# Altium PCB real_watch_1v1_displayboard.PcbDoc
Units mil, origin at the board's own origin, x right, y up, seen from the top; angles counter-clockwise.
Board outline 1574.8 x 1574.8 mil, 2 copper layers (Top Layer, Bottom Layer), stack 22.8 mil thick; 43 components, 48 nets, 177 pads, 53 vias.
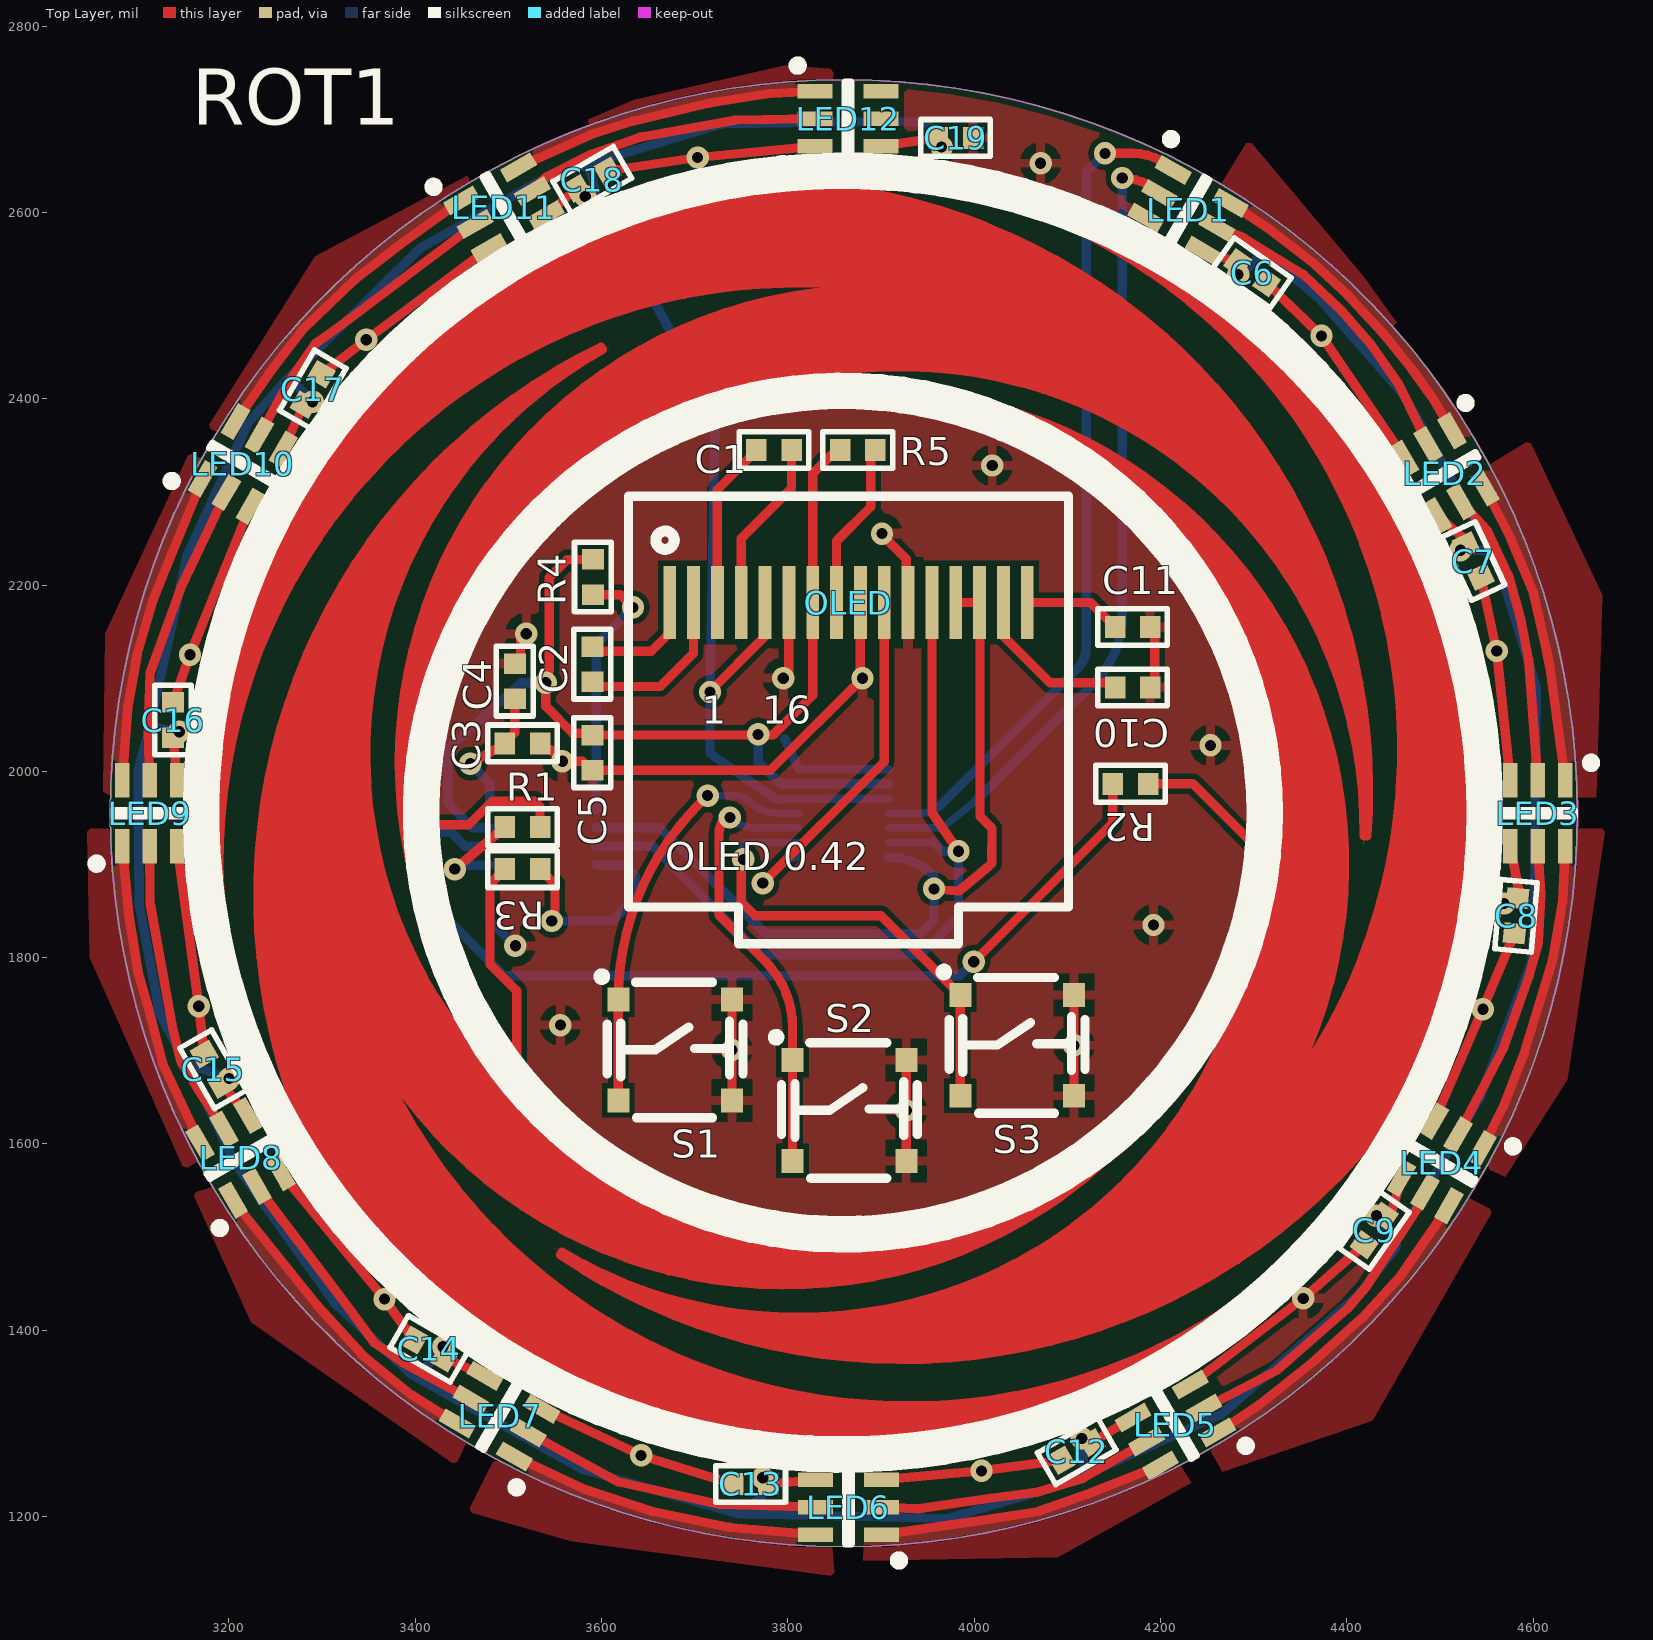
[diagram p0: Top Layer view]
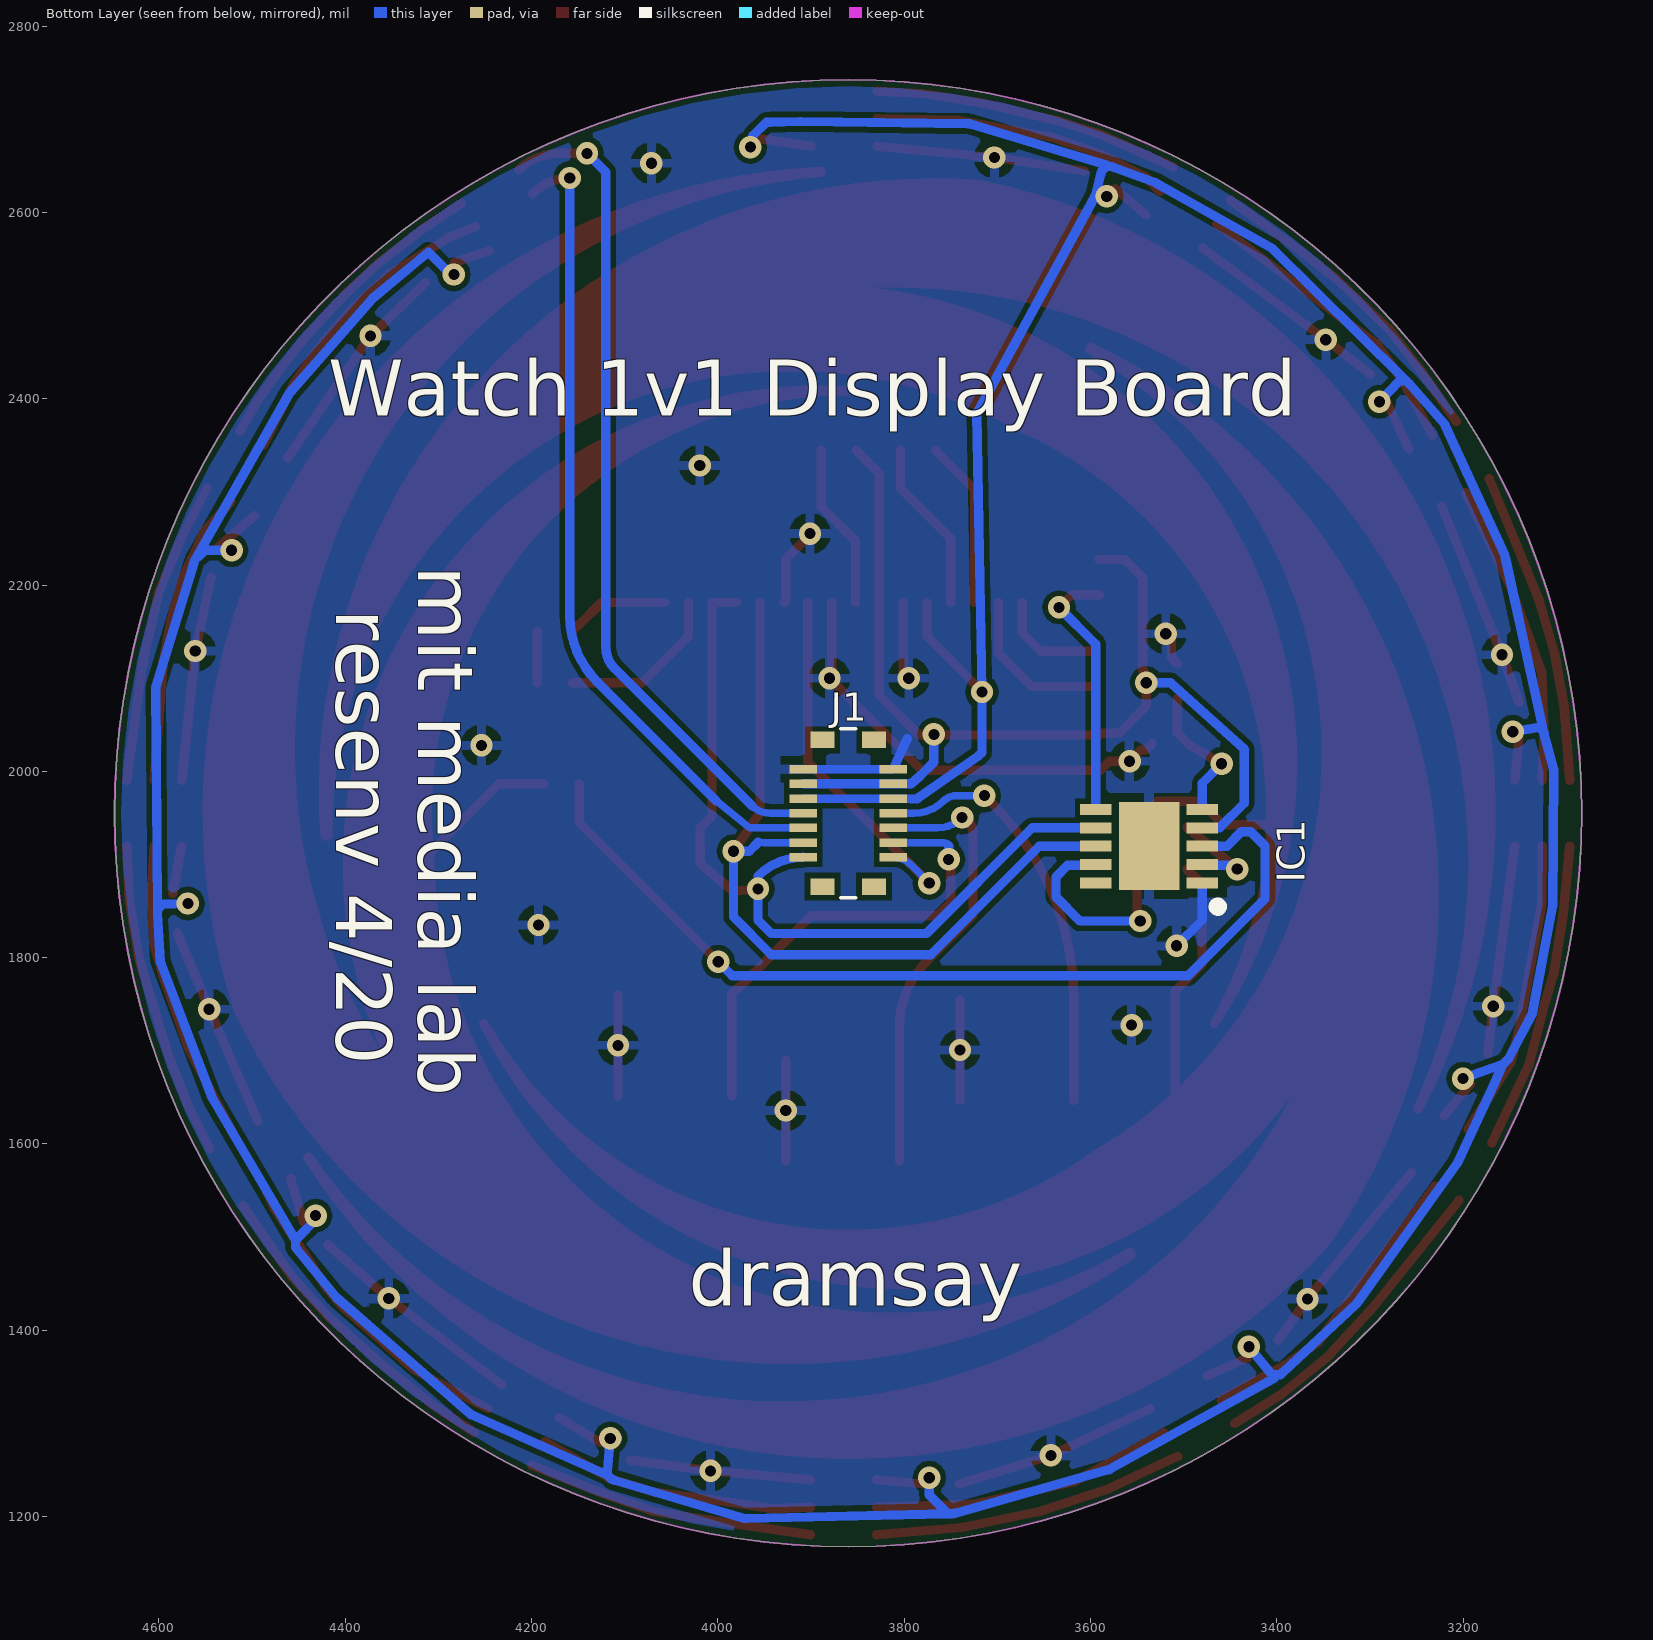
[diagram p1: Bottom Layer view, seen from below]
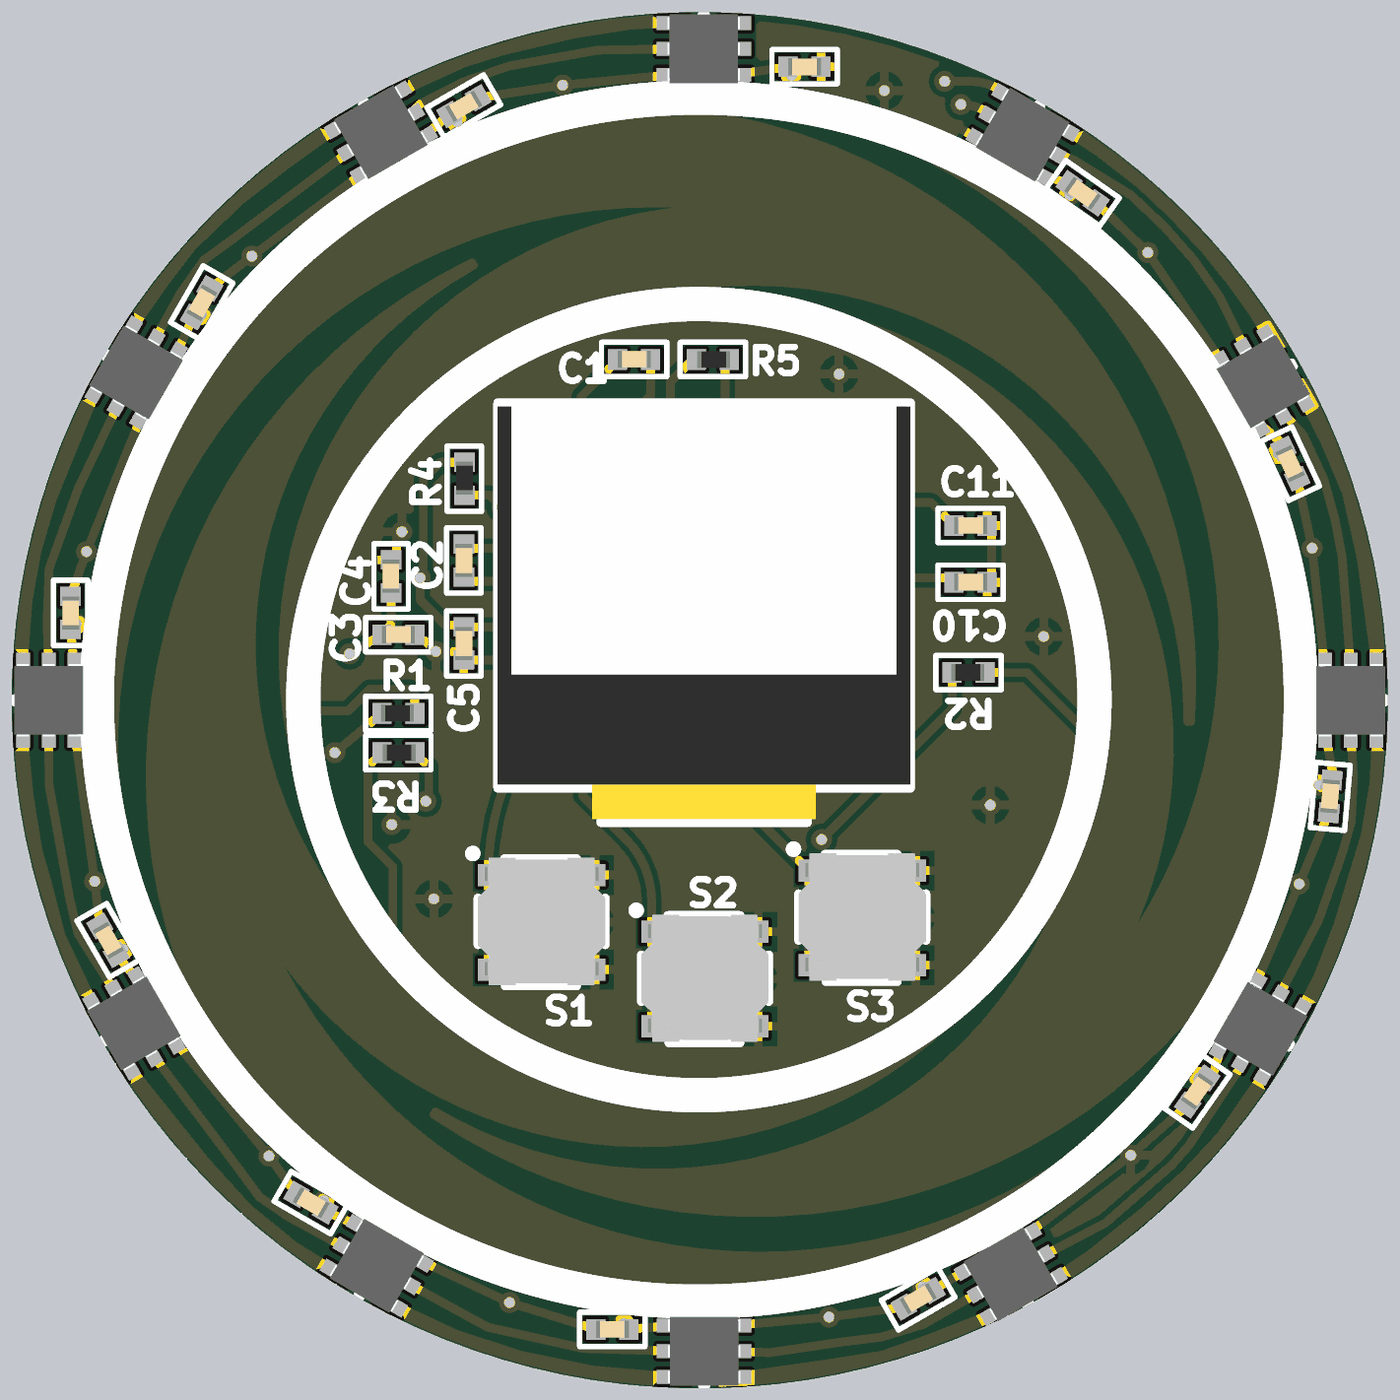
[diagram p2: 3D render of the assembled board from above, using the file's embedded part models]

## Layer stack, top to bottom
Top Solder: solder mask 0.4, Solder Resist, Dk 3.5
Top Layer: signal copper 1.4
Dielectric 1: dielectric 20, FR-4, Dk 4.8
Bottom Layer: signal copper 1.4
Bottom Solder: solder mask 0.4, Solder Resist, Dk 3.5

## Board outline
3860,1167.6 cw(c3860,1955) 3072.6,1955 cw(c3860,1955) 3860,2742.4 cw(c3860,1955) 4647.4,1955 cw(c3860,1955)

## Design rules (kind name [scope] priority, off if disabled: settings)
AssemblyTestPointUsage [All] p1 off:
AssemblyTestpoint [All] p1 off: testpointundercomponent=TRUE minsize=40 maxsize=100 preferedsize=60 minholesize=0 maxholesize=40 preferedholesize=32 testpointgrid=1 usegrid=TRUE gridtolerance=0.01 allowsidetop=TRUE allowsidebottom=TRUE
Clearance [All] p1 off: gap=6 ignorepadtopadclearanceinfootprint=FALSE except(0: Arc-Hole Track-Hole SMDPad-Hole THPad-Hole Via-Hole Fill-Hole Poly-Hole Region-Hole Text-Hole)
ComponentClearance [All] p1 off: gap=5 collisioncheckmode=3 verticalgap=5 showdistances=FALSE
DiffPairsRouting [All] p1 off: maxlimit=10 minlimit=10 mostfreqgap=10 toplayer_minwidth=15 toplayer_maxwidth=15 toplayer_prefwidth=15 bottomlayer_minwidth=15 bottomlayer_maxwidth=15 bottomlayer_prefwidth=15 maxuncoupledlength=500
FabricationTestPointUsage [All] p1 off: valid=0 allowmultiple=FALSE
FabricationTestpoint [All] p1 off: side=3 testpointundercomponent=TRUE minsize=40 maxsize=100 preferedsize=60 minholesize=0 maxholesize=40 preferedholesize=32 testpointgrid=1 allowsidetop=TRUE allowsidebottom=TRUE usegrid=TRUE gridtolerance=0.01
FanoutControl Fanout_BGA [IsBGA] p1 off: bgadir=Out bgaviamode=Centered fanoutstyle=Auto fanoutdirection=Alternating viagrid=1 // Fanout_BGA (Default Rule)
FanoutControl Fanout_LCC [IsLCC] p2 off: bgadir=Out bgaviamode=Centered fanoutstyle=Auto fanoutdirection=Alternating viagrid=1 // Fanout_LCC (Default Rule)
FanoutControl Fanout_SOIC [IsSOIC] p3 off: bgadir=Out bgaviamode=Centered fanoutstyle=Auto fanoutdirection=Alternating viagrid=1 // Fanout_SOIC (Default Rule)
FanoutControl Fanout_Small [(CompPinCount < 5)] p4 off: bgadir=Out bgaviamode=Centered fanoutstyle=Auto fanoutdirection=OutThenIn viagrid=1 // Fanout_Small (Default Rule)
FanoutControl Fanout_Default [All] p5 off: bgadir=Out bgaviamode=Centered fanoutstyle=Auto fanoutdirection=Alternating viagrid=1 // Fanout_Default (Default Rule)
Height [All] p1 off: minheight=0 maxheight=1000 prefheight=500
HoleSize [All] p1 off: absolutevalues=TRUE maxlimit=100 minlimit=1 maxpercent=80.000 minpercent=20.000
HoleToHoleClearance [All] p1 off: gap=10 allowstackedmicrovias=TRUE
LayerPairs [All] p1 off: enforce=TRUE
MinimumSolderMaskSliver [All] p1 off: minsoldermaskwidth=10
NetAntennae [All] p1 off: netantennaetolerance=0
PasteMaskExpansion [All] p1 off: expansion=0
PlaneClearance [All] p1 off: clearance=20
PlaneConnect [All] p1 off: planeconnectstyle=Relief reliefexpansion=20 reliefentries=4 reliefconductorwidth=10 reliefairgap=10
PolygonConnect [All] p1 off: connectstyle=Relief reliefconductorwidth=10 reliefentries=4 polygonreliefangle="90 Angle" airgapwidth=10
RoutingCorners [All] p1 off: cornerstyle=45-Degree minsetback=100 maxsetback=100
RoutingLayers [All] p1 off: top layer_v5=TRUE bottom layer_v5=TRUE
RoutingPriority [All] p1 off: routingpriority=0
RoutingTopology [All] p1 off: topology=Shortest
RoutingVias [All] p1 off: holewidth=28 width=50 viastyle="Through Hole" minholewidth=28 minwidth=50 maxholewidth=28 maxwidth=50
ShortCircuit [All] p1 off: allowed=FALSE
SilkToSilkClearance [All] p1 off: silktosilkclearance=10
SilkToSolderMaskClearance [IsPad] p1 off: minsilkscreentomaskgap=10 clearancetoexposedcopper=TRUE
SolderMaskExpansion [All] p1 off: expansion=4 istentingtop=FALSE
Width [All] p1 off: maxlimit=10 minlimit=6 preferedwidth=10 minimp=50.000000 maximp=50.000000 favimp=50.000000
3 further rules are at their usual default settings.

## Components (designator, comment, footprint, x,y, rotation, side; value= is the part's Value field where it differs from the comment)
C1 "Cap" 0402C 3785,2345 r180 top value=1uF
C2 "Cap" 0402C 3590,2115 r90 top value=1uF
C3 "Cap" 0402C 3515,2030 r180 top value=100pF
C4 "Cap" 0402C 3506.81,2096.78 r270 top value=1uF
C5 "Cap" 0402C 3590,2020 r90 top value=1uF
C6 "Cap" 0402C 4298.27,2535.23 r325 top value=10nF
C7 "Cap" 0402C 4535.81,2225.75 r295 top value=10nF
C8 "Cap" 0402C 4581.65,1844.93 r265 top value=10nF
C9 "Cap" 0402C 4429.43,1507.32 r235 top value=10nF
C10 "Cap" 0402C 4170,2090 r180 top value=2.2uF
C11 "Cap" 0402C 4170,2155 r180 top value=2.2uF
C12 "Cap" 0402C 4110,1270 r210 top value=10nF
C13 "Cap" 0402C 3760,1235 r180 top value=10nF
C14 "Cap" 0402C 3415,1380 r150 top value=10nF
C15 "Cap" 0402C 3182.9,1680.19 r120 top value=10nF
C16 "Cap" 0402C 3140,2055 r90 top value=10nF
C17 "Cap" 0402C 3290,2410 r60 top value=10nF
C18 "Cap" 0402C 3590,2635 r30 top value=10nF
C19 "Cap" 0402C 3980,2680 r0 top value=10nF
IC1 "IQS263A-0-DNR" SON50P300X300X80-11N-D 3537.09,1919.68 r0 bottom
J1 "AXT614124" AXT614124 3860,1955 r270 bottom locked
LED1 "COM-14608" SON75P200X200X100-6N 4229.55,2602.14 r330 top
LED2 "COM-14608" SON75P200X200X100-6N 4505,2320 r300 top
LED3 "COM-14608" SON75P200X200X100-6N 4605,1955 r270 top
LED4 "COM-14608" SON75P200X200X100-6N 4501.71,1579.08 r240 top
LED5 "COM-14608" SON75P200X200X100-6N 4215.92,1298.29 r210 top
LED6 "COM-14608" SON75P200X200X100-6N 3865,1210 r180 top
LED7 "COM-14608" SON75P200X200X100-6N 3490.45,1307.86 r150 top
LED8 "COM-14608" SON75P200X200X100-6N 3212.41,1585.18 r120 top
LED9 "COM-14608" SON75P200X200X100-6N 3115,1955 r90 top
LED10 "COM-14608" SON75P200X200X100-6N 3215,2330 r60 top
LED11 "COM-14608" SON75P200X200X100-6N 3495,2605 r30 top
LED12 "COM-14608" SON75P200X200X100-6N 3864.57,2700.47 r0 top
OLED "ER-OLED0.42" ER-OLED-0.42 3865,2130 r0 top locked
R1 "470" 0402R 3515,1940 r180 top
R2 "470" 0402R 4167.63,1986.64 r180 top
R3 "470" 0402R 3515,1895 r0 top
R4 "10k" 0402R 3590.57,2208.52 r90 top
R5 "10k" 0402R 3875,2345 r0 top
ROT1 "Rotary TSC 3 Electrode" "rotary_touch 3 electrode" 3858.98,1955.7 r0 top locked
S1 "USLPT3737AL2TR" USLPT3737 3678.98,1700.87 r0 top
S2 "USLPT3737AL2TR" USLPT3737 3866.02,1635.87 r0 top
S3 "USLPT3737AL2TR" USLPT3737 4046.02,1705.87 r0 top

## Footprints (in the part's own frame and the unit in brackets; to place one, negate y for a bottom-side part, rotate by r counter-clockwise, add the part's x,y. Pads: shape width x height; smd on the part's side, far side on the other; paste and mask are expansions set on the pad)
0402C [mm]
  rect 0.559x0.6 smd: 1(-0.48,0) 2(0.48,0)
  silkscreen extent -0.95,-0.5 0.95,0.5, body extent -0.48,-0.25 0.48,0.25, height 0.5
0402R [mm]
  rect 0.559x0.6 smd: 1(-0.48,0) 2(0.48,0)
  silkscreen extent -0.95,-0.5 0.95,0.5, body extent -0.46,-0.25 0.5,0.25, height 0.3
AXT614124 [mm]
  rect 0.23x0.75 smd: 1(-1.2,-1.225) 2(-1.2,1.225) 3(-0.8,-1.225) 4(-0.8,1.225) 5(-0.4,-1.225) 6(-0.4,1.225) 7(0,-1.225) 8(0,1.225) 9(0.4,-1.225) 10(0.4,1.225) 11(0.8,-1.225) 12(0.8,1.225) 13(1.2,-1.225) 14(1.2,1.225)
  rect 0.45x0.655 smd: MP1(-2,-0.703) MP2(-2,0.703) MP3(2,-0.703) MP4(2,0.703)
  silkscreen extent -2.3,-0.2 2.3,0.2, body extent -2.3,-1.58 2.3,1.58, height 1.13
ER-OLED-0.42 [mm] "BuyDisplay OLED 0.42 Display"
  rect 0.35x2 smd: 1(-4.875,1.3) 2(-4.225,1.3) 3(-3.575,1.3) 4(-2.925,1.3) 5(-2.275,1.3) 6(-1.625,1.3) 7(-0.975,1.3) 8(-0.325,1.3) 9(0.325,1.3) 10(0.975,1.3) 11(1.625,1.3) 12(2.275,1.3) 13(2.925,1.3) 14(3.575,1.3) 15(4.225,1.3) 16(4.875,1.3)
  silkscreen extent -6,-8 6,4.2, body extent -6,-7.9 6,4.1, height 1.35
"rotary_touch 3 electrode" [mil] "ROT_D 3 wire 3 electrode rotary, 35-23mm"
  Top Layer region: 154 vertices and 0 holes, not listed, extent -627.95,-688.75 572.13,501.35
  Top Layer region: 154 vertices and 0 holes, not listed, extent -688.96,-303.54 564.17,675.86
  Top Layer region: 154 vertices and 0 holes, not listed, extent -309.02,-587.09 688.88,687.41
  Top Layer lines w10: -611.21,-317.98 cw(c0,0) -143.44,673.88 cw(c-90.37,21.36) 562.66,-25.11 ; -610.21,-317.51 cw(c-48.56,-52.49) 43.25,561.72 ccw(c32.36,53.45) -392.1,-226.38 cw(c0,0) -183.81,413.76 cw(c61.99,-18.86) 559.53,-25.07 ; -303.07,-474.72 ccw(c63.68,67.58) 655.32,-212.72 ccw(c0,0) 30.23,688.31 ; -301.47,-472.03 ccw(c-47.33,-44.25) 450.24,-47.7 ccw(c0,0) 0,452.76 cw(c30.11,-54.75) 464.84,-318.32 ccw(c-21.17,68.3) 30.14,687.21 ; -259.59,499.83 ccw(c26.68,-88.94) -511.88,-461.16 ccw(c0,0) 580.98,-370.33 ; -258.05,497.1 ccw(c-14.66,63.11) -266.43,-366.07 ccw(c0,0) 392.1,-226.38 cw(c-62.47,1.3) -508.09,-243.41 ccw(c69.74,-15.81) 580.08,-369.71
  silkscreen extent -689,-689 689,689
SON50P300X300X80-11N-D [mm]
  rect 0.85x0.3 smd: 1(-1.45,1) 2(-1.45,0.5) 3(-1.45,0) 4(-1.45,-0.5) 5(-1.45,-1) 6(1.45,-1) 7(1.45,-0.5) 8(1.45,0) 9(1.45,0.5) 10(1.45,1)
  rect 1.65x2.4 smd: 11(0,0)
  silkscreen extent -2,1.53 -1.75,1.77, body extent -1.55,-1.5 1.55,1.5, height 0.8
SON75P200X200X100-6N [mm]
  rect 0.95x0.4 smd: 1(-0.9,0.75) 2(-0.9,0) 3(-0.9,-0.75) 4(0.9,-0.75) 5(0.9,0) 6(0.9,0.75)
  silkscreen extent -1.5,-1 0.08,1.57, body extent -1.05,-1 1.05,1, height 1
USLPT3737 [mm] "TE 0.35 switch"
  rect 0.6x0.65 smd: 1(-1.55,1.375) 2(-1.55,-1.375) 3(1.55,1.375) 4(1.55,-1.375)
  silkscreen extent -2.1,-1.85 1.85,2.1, body extent -1.85,-1.82 1.85,1.88, height 0.35

## Part data
C1 C2 C3 C4 C5 C6 C7 C8 C9 C10 C11 C12 C13 C14 C15 C16 C17 C18 C19: "Capacitor", LatestRevisionDate=17-Jul-2002, LatestRevisionNote="Re-released for DXP Platform.", PackageDescription="Radial Cap, Thru-Hole; 2 Leads; 0.3 in Pin Spacing", PackageReference=RAD-0.3, Published=8-Jun-2000, Publisher="Altium Limited"
IC1: "Integrated Circuit", Manufacturer_Name="Azoteq (Pty) Ltd", Datasheet Link=https://www.mouser.com/datasheet/2/42/iqs263_datasheet-357247.pdf, Height=0.8mm, Manufacturer_Part_Number=IQS263A-0-DNR
J1: "Connector", Manufacturer_Name=Panasonic, Mouser Part Number=769-AXT614124, Datasheet Link=https://componentsearchengine.com/Datasheets/1/AXT614124.pdf, Height=1.03mm, Manufacturer_Part_Number=AXT614124, Mouser Price/Stock=https://www.mouser.com/Search/Refine.aspx?Keyword=769-AXT614124
LED1 LED2 LED3 LED4 LED5 LED6 LED7 LED8 LED9 LED10 LED11 LED12: "LED", Manufacturer_Name=SparkFun, Mouser Part Number=474-COM-14608, Datasheet Link=https://componentsearchengine.com/Datasheets/1/COM-14608.pdf, Height=1mm, Manufacturer_Part_Number=COM-14608, Mouser Price/Stock=https://www.mouser.com/Search/Refine.aspx?Keyword=474-COM-14608
OLED: "BuyDisplay.com 0.42\" OLED Screen I2C/SPI"
R1 R2 R3 R4 R5: library part Resistor
S1 S2 S3: "TE 0.35mm low profile switch"

## Via types
v1: diameter 24, hole 12, Top Layer to Bottom Layer, tented both sides, 53 vias

## Nets (pads, with @x,y where several pads share a name; then routed paths per layer and width w, separated by ;. In a path a pad name is that pad's centre, name@x,y a point inside that pad or via, vN(x,y) a via of type N, cw(c..) or ccw(c..) an arc to the next point about the centre after c; other vN are vias at no path point)
BTN1: J1.8 S1.1 S1.2 | length 457.2
  Top Layer w10: S1.2 S1.1 cw(c3915.21,1755) 3705.05,1965.23 v1(3713.79,1973.96)
  Bottom Layer w8: v1(3713.79,1973.96) 3743.64,1973.96 cw(c3743.64,1954.1) 3757.68,1968.15 ccw(c3789.42,1999.88) 3789.42,1955 J1.8
BTN2: J1.10 S2.1 S2.2 | length 484.5
  Top Layer w10: v1(3737.66,1950.37) 3737.66,1951.03 3734.92,1953.77 ccw(c3736.23,1952.46) 3734.38,1952.46 ccw(c3754.77,1932.08) 3725.94,1932.08 3725.94,1845.76 3775.71,1795.99 cw(c3705,1725.28) 3805,1725.28 S2.1 S2.2
  Bottom Layer w8: v1(3737.66,1950.37) ccw(c3764.5,1977.21) 3764.5,1939.25 J1.10
BTN3: J1.12 S3.1 S3.2 | length 507.7
  Top Layer w10: v1@3750,1905.52 3750,1860 3765,1845 3900,1845 3977.2,1767.8 3978.19,1767.8 3985,1760.98 S3.1 S3.2
  Bottom Layer w8: 3752.22,1918.86 3750.93,1920.15 cw(c3759.03,1912.05) 3759.03,1923.5 J1.12
  Bottom Layer w10: v1(3752.22,1905.52) 3752.22,1918.86
GND: C3.1 C4.1 C5.1 C6.2 C7.2 C8.2 C9.2 C10.1 C11.1 C12.2 C13.2 C14.2 C15.2 C16.2 C17.2 C18.2 C19.2 IC1.1 IC1.11 J1.1 J1.2 LED1.3 LED2.3 LED3.3 LED4.3 LED5.3 LED6.3 LED7.3 LED8.3 LED9.3 LED10.3 LED11.3 LED12.3 OLED.6 OLED.9 OLED.11 S1.3 S1.4 S2.3 S2.4 S3.3 S3.4 | length 3743.9
  Top Layer w10: C16.2 v1(3158.21,2125.13) LED10.3 ; LED9.3 v1(3167.58,1747.78) C15.2 ; LED8.3 v1(3366.91,1433.46) C14.2 ; C17.2 v1(3347.38,2463.25) LED11.3 ; C4.1 3506.98,2115.67 3512.98,2121.67 3512.98,2141.67 v1(3519.06,2147.76) ; C3.1 3533.9,2029.19 3539.9,2023.19 3545.56,2023.19 v1(3557.91,2010.84) 3579.45,2010.84 3589.19,2001.1 3781.1,2001.1 3877.8,2097.8 OLED.9 ; LED7.3 v1(3642.37,1265.67) C13.2 ; C18.2 v1(3703.08,2658.95) LED12.3 ; S1.4 v1(3740,1700.87) S1.3 ; v1(3795,2100) 3801.02,2106.02 OLED.6 ; v1@3900,2255 3927.09,2227.91 3927.09,2183.07 OLED.11 ; LED6.3 v1(4007.85,1249.11) C12.2 ; S2.4 v1(3927.05,1635.87) S2.3 ; S3.4 v1(4107.05,1705.87) S3.3 ; C10.1@4193.9,2095 C11.1@4193.9,2150 ; LED5.3 v1(4353.23,1434.22) C9.2 ; C6.2 v1(4372.74,2467.37) LED2.3 ; LED4.3 v1(4546.02,1744.69) C8.2 ; C7.2 v1(4560.8,2129.1) LED3.3
  Bottom Layer w9: J1.2 J1.1
  Bottom Layer w10: IC1.1 3480,1840.22 v1(3507.48,1812.74) ; 3796.53,2034.85 J1.2@3811.77,2002.5
  other v1: 3555.72,1727.61 4192.49,1835.07 4253.63,2027.89 3880,2100 3900.93,2255.15 4019.37,2328.31 4071.23,2652.76
I2C_SCL: IC1.8 J1.11 OLED.12 | length 879
  Top Layer w10: OLED.12 3954.57,1955.47 v1(3983.09,1914.29)
  Bottom Layer w8: J1.11 3947.15,1923.5 3950.48,1923.5 3956.53,1923.71
  Bottom Layer w10: IC1.8 3654.82,1919.68 3771.29,1803.21 3942.5,1803.21 3983.09,1843.8 v1(3983.09,1914.29) 3966.21,1914.29 3956.79,1923.71 3956.53,1923.71
I2C_SDA: IC1.7 J1.13 OLED.13 OLED.14 | length 900.9
  Top Layer w10: v1(3956.79,1873.78) 3975.66,1872 3979.72,1871.62 3983.81,1871.62 3986.59,1873.94 4015.57,1898.09 4018.8,1901.32 4018.82,1905.42 4019.02,1938.9 4006.09,1951.83 4006.09,2180.84 OLED.14 OLED.13
  Bottom Layer w10: IC1.7 3662.49,1939.37 3775.92,1825.94 3942.6,1825.94 3956.79,1840.12 v1(3956.79,1873.78) 3956.79,1883.31 3956.79,1887.64 ccw(c3908.23,1839.09) J1.13
LED_C2: LED4.5 LED5.2 | length 339.8
  Top Layer w10: LED5.2 4324.54,1356.9 4325.43,1357.67 4400.23,1422.98 4400.72,1423.47 4400.95,1423.73 4419.92,1445.58 4475.93,1530.92 4476.24,1531.59 LED4.5
LED_C3: LED8.5 LED9.2 | length 320.5
  Top Layer w10: LED9.2 3115.29,1858.37 3115.45,1857.51 3139.31,1725.69 3139.38,1725.41 3148.46,1687.95 3149.32,1686.58 3165.62,1660.5 3165.67,1660.42 LED8.5
LED_CLK: J1.9 LED1.2 | length 877.8
  Top Layer w10: v1(4158.81,2636.92) cw(c4158.81,2581.41) 4198.07,2620.66 LED1.2
  Bottom Layer w8: J1.9 3965.67,1939.25 4001.81,1968.54
  Bottom Layer w10: 4001.81,1968.54 4129.52,2096.25 ccw(c4058.81,2166.96) 4158.81,2166.96 v1(4158.81,2636.92)
LED_D2: LED4.6 LED5.1 | length 350.6
  Top Layer w10: LED5.1 4306.32,1320.49 4306.65,1320.76 4366.67,1368.69 4366.89,1368.89 4415.54,1412.72 4415.86,1413.04 4415.99,1413.18 4456.59,1457 4457,1457.58 LED4.6
LED_D3: LED8.6 LED9.1 | length 332.2
  Top Layer w10: LED9.1 3092.41,1846.93 3092.47,1846.62 3102.71,1782.88 3102.88,1782.29 3113,1747.43 3113.04,1747.28 3129.02,1685.66 3129.42,1684.8 LED8.6
LED_DATA: J1.7 LED1.1 | length 907.6
  Top Layer w10: v1(4140.31,2663.35) 4170.38,2663.35 cw(c4170.38,2602.18) LED1.1
  Bottom Layer w8: J1.7 3943.91,1955 ccw(c3943.91,1982.34) 3963.24,1963.01
  Bottom Layer w10: 3963.24,1963.01 4111.02,2110.79 ccw(c4089.16,2132.65) 4120.08,2132.65 4120.08,2643.12 v1(4140.31,2663.35)
NetC1_1: C1.1 OLED.4 | length 186.2
  Top Layer w10: OLED.4 3749.84,2249.84 3803.9,2303.9 C1.1
NetC1_2: C1.2 OLED.3 | length 181.2
  Top Layer w10: OLED.3 3724.25,2302.34 3766.1,2344.19 C1.2
NetC2_1: C2.1 OLED.2 | length 167.8
  Top Layer w10: C2.1@3600,2091.1 3662.95,2091.1 3698.66,2126.81 OLED.2
NetC2_2: C2.2 OLED.1 | length 113.8
  Top Layer w10: C2.2@3600,2128.9 3653.27,2128.9 3673.07,2148.7 OLED.1
NetC3_2: C3.2 C4.2 IC1.5 | length 152.9
  Top Layer w10: v1(3459.17,2008.12) C3.2 3496.1,2030.81 3506.81,2041.52 C4.2
  Bottom Layer w10: v1(3459.17,2008.12) 3480,1987.29 IC1.5
NetC10_2: C10.2 OLED.15 | length 181.7
  Top Layer w10: OLED.15 4031.34,2144.96 4081.29,2095 C10.2@4156.1,2095
NetC11_2: C11.2 OLED.16 | length 112.6
  Top Layer w10: OLED.16 4124.92,2181.18 4149.29,2156.81 4150.1,2156.81 4156.1,2150.81 C11.2@4156.1,2150
NetLED1_5: LED1.5 LED2.2 | length 335.2
  Top Layer w10: LED1.5 4287.44,2573.49 4288.22,2573.18 4289.94,2572.12 4352.9,2533.46 4353.56,2533.02 4391.45,2497.32 4391.56,2497.21 4391.88,2496.89 4394.59,2493.82 4424.85,2459.57 4425.23,2459.15 4427.36,2456.11 4454.91,2416.8 4455.36,2416.15 4456.72,2413.37 LED2.2
NetLED1_6: LED1.6 LED2.1 | length 344.7
  Top Layer w10: LED1.6 4317.27,2581.71 4317.55,2581.53 4363.84,2545.81 4364.22,2545.51 4364.68,2545.08 4400.72,2511.2 4400.83,2511.09 4401.08,2510.85 4403.87,2507.84 4438.94,2470.07 4439.19,2469.81 4468.78,2432.91 4468.96,2432.69 4470.98,2429.86 4492.6,2399.6 4492.85,2399.25 LED2.1
NetLED2_5: LED2.5 LED3.2 | length 317.8
  Top Layer w10: LED2.5 4549.67,2259.53 4550.67,2258.42 4573.76,2209.19 4574.12,2208.42 4586.82,2162.51 4586.9,2162.13 4595.08,2119.99 4595.12,2119.66 4595.18,2118.97 LED3.2
NetLED2_6: LED2.6 LED3.1 | length 328.2
  Top Layer w10: LED2.6 4575.11,2251.64 4575.28,2251.31 4576.2,2249.11 4599.65,2193.38 4599.99,2192.58 4600.43,2190.63 4613.73,2132.36 4613.76,2132.22 4613.98,2131.12 4617.75,2112.27 4617.81,2111.97 4617.94,2110.99 LED3.1
NetLED3_5: LED3.5 LED4.2 | length 328
  Top Layer w10: LED4.2 4566.95,1700.48 4567.98,1702.46 4568.22,1703.13 4594.66,1777.78 4595.53,1780.23 4595.62,1780.55 4605.65,1816.28 4605.71,1817.41 4608.07,1866.62 4608.07,1867.15 4608.05,1867.44 LED3.5
NetLED3_6: LED3.6 LED4.1 | length 339.8
  Top Layer w10: LED4.1 4567.58,1639.27 4567.76,1639.74 4590.26,1697.6 4590.37,1697.96 4620.54,1797.07 4621.45,1800.08 4621.56,1800.71 4631.58,1860.02 4631.61,1860.61 LED3.6
NetLED5_5: LED5.5 LED6.2 | length 298.9
  Top Layer w10: LED6.2 3939.01,1208.34 3939.23,1208.33 3940.18,1208.33 4019.13,1220.04 4019.33,1220.06 4067.74,1226.11 4068.55,1226.36 4115.94,1240.7 4116.93,1241.27 LED5.5
NetLED5_6: LED5.6 LED6.1 | length 310.5
  Top Layer w10: LED6.1 4008.82,1195.98 4008.89,1196 4069.07,1205.55 4069.93,1205.86 4121.81,1224.17 4121.98,1224.23 LED5.6
NetLED6_5: LED6.5 LED7.2 | length 324.6
  Top Layer w10: LED7.2 3617.32,1237.46 3618.7,1237.15 3726.68,1213.15 3727.62,1213.12 LED6.5
NetLED6_6: LED6.6 LED7.1 | length 336.9
  Top Layer w10: LED7.1 3580.46,1229.76 3581.04,1229.57 3654.58,1205.46 3655.14,1205.34 3737.62,1188.44 3738.19,1188.39 LED6.6
NetLED7_5: LED7.5 LED8.2 | length 330.4
  Top Layer w10: LED8.2 3326.89,1426.02 3355.51,1387.32 3356.68,1386.15 3357.44,1385.63 3385.35,1366.44 3386.41,1365.38 3387.68,1364.69 LED7.5
NetLED7_6: LED7.6 LED8.1 | length 342.4
  Top Layer w10: LED8.1@3204.29,1539.52 3294.49,1427.02 3294.7,1426.79 3343.15,1373.53 3343.68,1373 3344.08,1372.68 3395.75,1330.62 3396.29,1330.28 LED7.6
NetLED9_5: LED9.5 LED10.2 | length 325.8
  Top Layer w10: LED9.5 3113.02,2043.29 3113.01,2043.48 3113.01,2043.85 3113.16,2047.96 3115.23,2103.86 3115.29,2105.42 3148.29,2196.47 3148.46,2196.93 LED10.2
NetLED9_6: LED9.6 LED10.1 | length 337.7
  Top Layer w10: LED9.6 3091.23,2068.3 3091.27,2068.82 3101.47,2125.48 3101.57,2126.01 3118.58,2183.87 3118.72,2184.34 3138.16,2232.36 LED10.1
NetLED10_5: LED10.5 LED11.2 | length 329.6
  Top Layer w10: LED10.5 3264.85,2419.46 3265.12,2419.96 3291.61,2457.48 3292.1,2458.18 3293.28,2459.36 3296.55,2461.71 3321.08,2479.37 3321.17,2479.44 LED11.2
NetLED10_6: LED10.6 LED11.1 | length 342.3
  Top Layer w10: LED10.6 3247.85,2433.51 3247.97,2433.69 3279.01,2474.21 3334.53,2527.13 3334.89,2527.48 3386.21,2567.39 3386.36,2567.51 LED11.1
NetLED11_5: LED11.5 LED12.2 | length 320.5
  Top Layer w10: LED11.5 3538.72,2636.31 3539.92,2637.51 3541.34,2638.23 3587.85,2661.83 3588.81,2662.44 3640.68,2680.48 3641.43,2680.74 3643.08,2681.04 3742.43,2698.9 3743.22,2699.04 3744.1,2699.06 LED12.2
NetLED11_6: LED11.6 LED12.1 | length 331.2
  Top Layer w10: LED11.6 3589.41,2683.92 3589.96,2684.17 3592,2684.82 3633.07,2697.79 3633.42,2697.9 3634.91,2698.25 3715.4,2717.25 3715.77,2717.34 3780.43,2727.55 3780.97,2727.64 3781.75,2727.67 LED12.1
NetR1_1: R1.1 | length 170.9
  Top Layer w10: 3397.85,1942.79 3457.37,1942.79 3482.5,1967.92 3528.04,1967.92 3533.9,1962.06 R1.1
NetR2_1: R2.1 | length 210.2
  Top Layer w10: R2.1 4234.72,1986.64 4349.28,1872.08
NetR3_1: R3.1 | length 274.9
  Top Layer w10: R3.1 3496.1,1894.19 3490.1,1888.19 3489.29,1888.19 3480.12,1879.02 3480.12,1793.01 3508.76,1764.38 3508.76,1639.04
OLED_RST: J1.14 OLED.10 | length 404.3
  Top Layer w10: v1(3773,1880) 3903.39,2010.39 OLED.10
  Bottom Layer w8: v1(3773,1880) 3792.97,1899.97 cw(c3811.77,1881.16) J1.14
ROT3_P1: IC1.2 R1.2 | length 109.7
  Top Layer w10: v1(3442.43,1894.99) R1.2
  Bottom Layer w10: v1(3442.43,1894.99) 3446.22,1894.99 3450.32,1899.09 3479.09,1899.09 IC1.2
ROT3_P2: IC1.3 R2.2 | length 1017.1
  Top Layer w10: v1(3999.41,1795.59) 4148.73,1944.91 R2.2
  Bottom Layer w10: IC1.3 3453.34,1919.68 3437.73,1935.3 3428.09,1935.3 3412.53,1919.74 3412.53,1863.3 3495.29,1780.54 3984.36,1780.54 v1(3999.41,1795.59)
ROT3_P3: IC1.9 R3.2 | length 235.1
  Top Layer w10: R3.2 3533.9,1894.19 3539.9,1888.19 3540.71,1888.19 3549.9,1879 3549.9,1842.79 v1(3546.52,1839.41)
  Bottom Layer w10: v1(3546.52,1839.41) 3611.34,1839.41 3637.02,1865.09 3637.02,1886.59 3624.51,1899.09 3595.08,1899.09 IC1.9
ROT3_RDY: IC1.6 R4.1 | length 282
  Top Layer w10: R4.1 3620,2189.62 v1(3633.67,2175.96)
  Bottom Layer w10: IC1.6 3594.17,2136.46 v1(3633.67,2175.96)
VBAT: C6.1 C7.1 C8.1 C9.1 C12.1 C13.1 C14.1 C15.1 C16.1 C17.1 C18.1 C19.1 J1.5 J1.6 LED1.4 LED2.4 LED3.4 LED4.4 LED5.4 LED6.4 LED7.4 LED8.4 LED9.4 LED10.4 LED11.4 LED12.4 OLED.5 | length 6349.6
  Top Layer w10: C16.1 LED9.4 ; C15.1 3192.44,1663.71 LED8.4 ; LED10.4 C17.1 ; C14.1 LED7.4 ; LED11.4 C18.1 ; v1@3715.48,2085 3775.43,2144.96 OLED.5 ; C13.1 LED6.4 ; LED12.4 C19.1 ; C12.1 LED5.4 ; LED1.4 C6.1 ; C9.1@4444.45,1516.37 LED4.4 ; LED2.4 C7.1@4535.55,2241.37 ; LED3.4 C8.1@4585,1868.9
  Bottom Layer w9: 3792.57,1970.36 J1.6 J1.5
  Bottom Layer w10: 3102.53,1999.42 3103.74,1855.8 3103.91,1854.92 3125.67,1740.08 3126.36,1738.75 3151.26,1691.39 3157.12,1685.53 ; 3102.53,1999.46 3102.53,2000.79 3103.55,2004.66 3112.84,2039.97 3113.53,2042.58 3118.16,2047.22 v1(3146.57,2042.56) ; 3114.72,2047.97 3154.67,2229.93 3154.9,2230.98 3218.85,2370.94 3219.46,2372.28 3257.59,2415.7 3257.81,2415.94 3260.96,2419.1 ; v1(3200.07,1670.12) 3157.12,1685.53 ; v1(3289.82,2396.71) 3268.08,2419.1 3260.96,2419.1 ; 3402.43,1348.72 3403.7,1348.02 3579.01,1250.96 3580.02,1250.4 3746.04,1203.45 3747.38,1203.08 3752.91,1203.08 ; v1(3429.87,1382.42) 3408.03,1355.86 3404.32,1352.15 3396.25,1352.15 3393.37,1354.82 3315.07,1427.69 3314.37,1428.39 3313.89,1429.05 3206.06,1579.29 3205.66,1580.16 3166.21,1665.8 3157.12,1685.53 ; 3582.7,2650.69 3728.5,2694.67 3729.85,2695.07 3731.31,2695.09 3911.18,2697.51 3911.25,2697.51 3911.42,2697.51 3943.59,2696.89 3947.62,2696.81 3962.32,2682.11 3962.32,2672.68 v1(3965,2670) ; v1(3772.92,1241.71) 3772.92,1223.09 3752.91,1203.08 ; 3792.57,1970.36 3789.44,1970.36 3785.82,1970.72 3720.07,2016.61 3716.45,2020.23 3716.44,2024.37 v1(3716.41,2085.15) 3721.91,2383.81 3594.23,2618.7 3592.92,2624.12 3589.02,2640.34 3588.09,2644.24 3583.16,2649.16 3577.61,2649.16 3575.56,2648.54 3530.08,2631.73 3529.39,2631.34 3404.61,2561.08 3403.66,2560.14 3264.56,2422.66 3260.96,2419.1 ; v1@4107.59,1284.63 v1@4108.45,1281.84 ; v1(4115.33,1283.98) 4118.3,1250.13 4118.3,1244.47 ; v1(4283.26,2533.32) 4286.61,2533.32 4310.59,2557.3 4317.6,2551.48 4370.32,2507.69 4370.88,2507.14 4371.09,2506.9 4459.49,2406.38 4460,2405.48 4558.46,2231.73 4561.61,2226.17 4562.34,2223.8 4603.22,2090.93 4603.22,2089.39 ; v1@4431.23,1517.56 4432.63,1517.56 4449.57,1500.62 4453.32,1496.87 ; v1(4521.83,2237.28) 4550.49,2237.28 4556.92,2230.86 ; v1(4568.75,1858.06) 4595.69,1857.21 4601.41,1851.49 ; 4603.22,2089.35 4601.41,1851.49 ; 3752.91,1203.08 3969.48,1198.06 3969.6,1198.05 3971.15,1198.05 4111.11,1239.02 4113.56,1239.73 4118.3,1244.47 ; 4118.3,1244.47 4120.4,1245.41 4264.44,1309.47 4265.82,1310.09 4408.92,1434.99 4409.13,1435.18 ; 4409.13,1435.18 4409.17,1435.22 ; 4409.17,1435.22 4409.77,1435.81 4451.07,1486.41 4453.32,1489.17 4453.32,1496.87 ; 4453.32,1496.87 4541.9,1648 4542.33,1648.72 4597.82,1794.68 4598.36,1796.11 4601.4,1846.75 4601.41,1847.04 4601.41,1851.49
  other v1: 4431.68,1523.09 3582.39,2617.13
VDD: C5.2 IC1.4 J1.3 J1.4 OLED.7 R4.2 R5.1 | length 1211
  Top Layer w10: R4.2 3563.07,2227.42 3543.75,2208.09 3543.75,2107.86 3542.68,2106.79 3542.68,2097.68 v1(3540,2095) 3540,2070 3569.05,2040.95 3587.94,2040.95 C5.2 3783.9,2038.9 3826.61,2081.61 OLED.7 3826.61,2319.7 3851.1,2344.19 R5.1@3851.1,2345
  Bottom Layer w10: IC1.4 IC1.4 3461.31,1939.41 3434.94,1965.77 3434.94,2023.72 3513.63,2095.03 3517.49,2095.03 v1(3540,2095) ; v1(3767.99,2039.68) 3767.99,2009.9 3782.72,1995.17 3792.45,1986.72 3793.79,1986.69 3796.54,1986.66 J1.4 J1.3
VDD_PULLUP: OLED.8 R5.2 | length 179
  Top Layer w10: OLED.8 3852.2,2247.2 3888.9,2283.9 R5.2@3888.9,2345
pads on no net: IC1.10 J1.MP1 J1.MP2 J1.MP3 J1.MP4 LED12.5 LED12.6

## Polygon pours and split planes (outlines as drawn)
GND on Top Layer "gnd top" (solid, remove dead copper, pour order 12): 3860,1167.6 cw(c3860,1955) 3072.6,1955 cw(c3860,1955) 3860,2742.4 cw(c3860,1955) 4647.4,1955 cw(c3860,1955)
NetLED2_6 on Top Layer "NETLED2_6_L01_P007" (solid, pour order 7): 4538.33,2319.96 4595.54,2355.4 4674.02,2188.83 4667.44,1971.63 4632.5,1972.64 4617.94,2110.99 4582.38,2237.94
NetLED5_6 on Top Layer "NETLED5_6_L01_P010" (solid, pour order 10): 4215.72,1263.45 4232.81,1236.46 4089.77,1156.4 3881.05,1152.8 3881.95,1179.79 3957.48,1185.25 4060.15,1206.72 4121.81,1224.17
LED_D2 on Top Layer "LED_D2_L01_P009" (solid, pour order 9): 4518.89,1548.64 4556.68,1528.84 4427.13,1303.04 4267,1248.16 4247.2,1281.44 4306.65,1320.76 4415.54,1412.72 4457,1457.58
NetLED3_6 on Top Layer "NETLED3_6_L01_P008" (solid, pour order 8): 4634.05,1938.18 4677.23,1939.08 4636.74,1669.19 4570.17,1564.83 4535.09,1580.12 4567.58,1639.27 4612.45,1775.34 4626.57,1830.37
NetLED1_6 on Top Layer "NETLED1_6_L01_P006" (solid, pour order 6): 4257.58,2617.79 4294.43,2678.07 4417.68,2531.37 4540.26,2362.57 4520.17,2349.17 4481.79,2414.73 4427.73,2481.8 4364.68,2545.08
NetLED11_6 on Top Layer "NETLED11_6_L01_P005" (solid, pour order 5): 3494.16,2638.93 3484.6,2655.96 3635.02,2720.78 3797.48,2757.76 3849.01,2754.03 3846.93,2729.09 3715.77,2717.34 3570.61,2677.57
NetLED10_6 on Top Layer "NETLED10_6_L01_P004" (solid, pour order 4): 3198.06,2360.21 3176.6,2368.89 3292.58,2552.9 3455.59,2639.2 3464.72,2623.67 3360.55,2547.43 3279.01,2474.21 3233.22,2412.26
NetLED9_6 on Top Layer "NETLED9_6_L01_P003" (solid, pour order 3): 3181.17,2329.62 3157.88,2342.86 3067.47,2147.43 3065.19,1971.18 3087.1,1972.55 3091.27,2068.82 3118.72,2184.34 3154.93,2273.22
LED_D3 on Top Layer "LED_D3_L01_P002" (solid, pour order 2): 3179.68,1589.06 3152.02,1572.59 3050.6,1800.46 3047.97,1938.76 3086.82,1938.1 3088.94,1883.25 3092.47,1846.62 3102.88,1782.29 3137.53,1670.06
NetLED7_6 on Top Layer "NETLED7_6_L01_P001" (solid, pour order 1): 3462.33,1296.42 3443.2,1255.29 3224.15,1408.81 3161.02,1547.03 3201.68,1560.42 3226.55,1516.42 3288.24,1434.64 3344.08,1372.68 3395.75,1330.62
NetLED6_6 on Top Layer "NETLED6_6_L01_P000" (solid, pour order 0): 3493.23,1278.85 3551.42,1241.75 3654.58,1205.46 3737.62,1188.44 3846.51,1181.61 3849.9,1135.77 3567.44,1173.44 3456.96,1205.48
GND on Bottom Layer "gnd bot" (solid, remove dead copper, pour order 11): 3860,1167.6 cw(c3860,1955) 3072.6,1955 cw(c3860,1955) 3860,2742.4 cw(c3860,1955) 4647.4,1955 cw(c3860,1955)

## Keep-outs
Keep-Out Layer:
  the board outline again, w2

## Other copper
Top Layer:
  pour cut-out: 3885.71,2408.63 3754.56,2394.03 3745.07,2447.66
  pour cut-out: 3271.86,1639.09 3240.49,1623.34 3325.31,1506.64
  pour cut-out: 4496.96,1695.77 4451.89,1575.91 4415.52,1592.69
  pour cut-out: 4290.8,1826.96 4246.79,1739.68 4271.06,1720.31
  pour cut-out: 3896.68,2653.56 3723.93,2641.56 3878.35,2622.47
  pour cut-out: 3823.73,2629.18 3620.25,2601.3 3361.3,2436.55 3205.95,2159.71 3173.38,1891.14 3240.47,1652.16 3355.51,1485.37 3596.32,1317.22 3930.53,1270.45 4211.75,1369.01 4380.66,1513.93 4452.75,1606.02 4514.3,1742.98 4547.87,1966.97 4471.29,2271.55 4251.59,2528.17 4038.94,2620.51 3889.21,2644.01 4257.35,2170.13 4325.28,1976.47 4279.47,1707.59 4084.29,1550.25 3901.68,1504.96 3668.02,1526.35 3464.07,1698.73 3466.88,1729.32 3405.12,1876.89 3425.04,2119.87 3566.45,2311.07 3751.87,2404.8 3858.98,2408.45 4039.22,2371.03

## Silkscreen, mask and mechanical layers (free items; w line width, h text height)
Bottom Overlay:
  text "Watch 1v1 Display Board" at 4418.11,2381.87 h60
  text "mit media lab" at 4321.25,2220.69 h60 r90
  text "resenv 4/20" at 4409.38,2174.13 h60 r90
  text "dramsay" at 4031.13,1426.17 h60

## Text inside footprints (layer, text, board x,y; h text height)
OLED: Top Overlay "1   16" at 3707.52,2051.26 h30; Top Overlay "OLED 0.42" at 3668.15,1893.78 h30